# Altium PCB Analog.PcbDoc
Units mm, origin at the board's own origin, x right, y up, seen from the top; angles counter-clockwise.
Board outline 78.49 x 77.09 mm, 2 copper layers (Top Layer, Bottom Layer); 44 components, 21 nets, 117 pads, 23 vias.
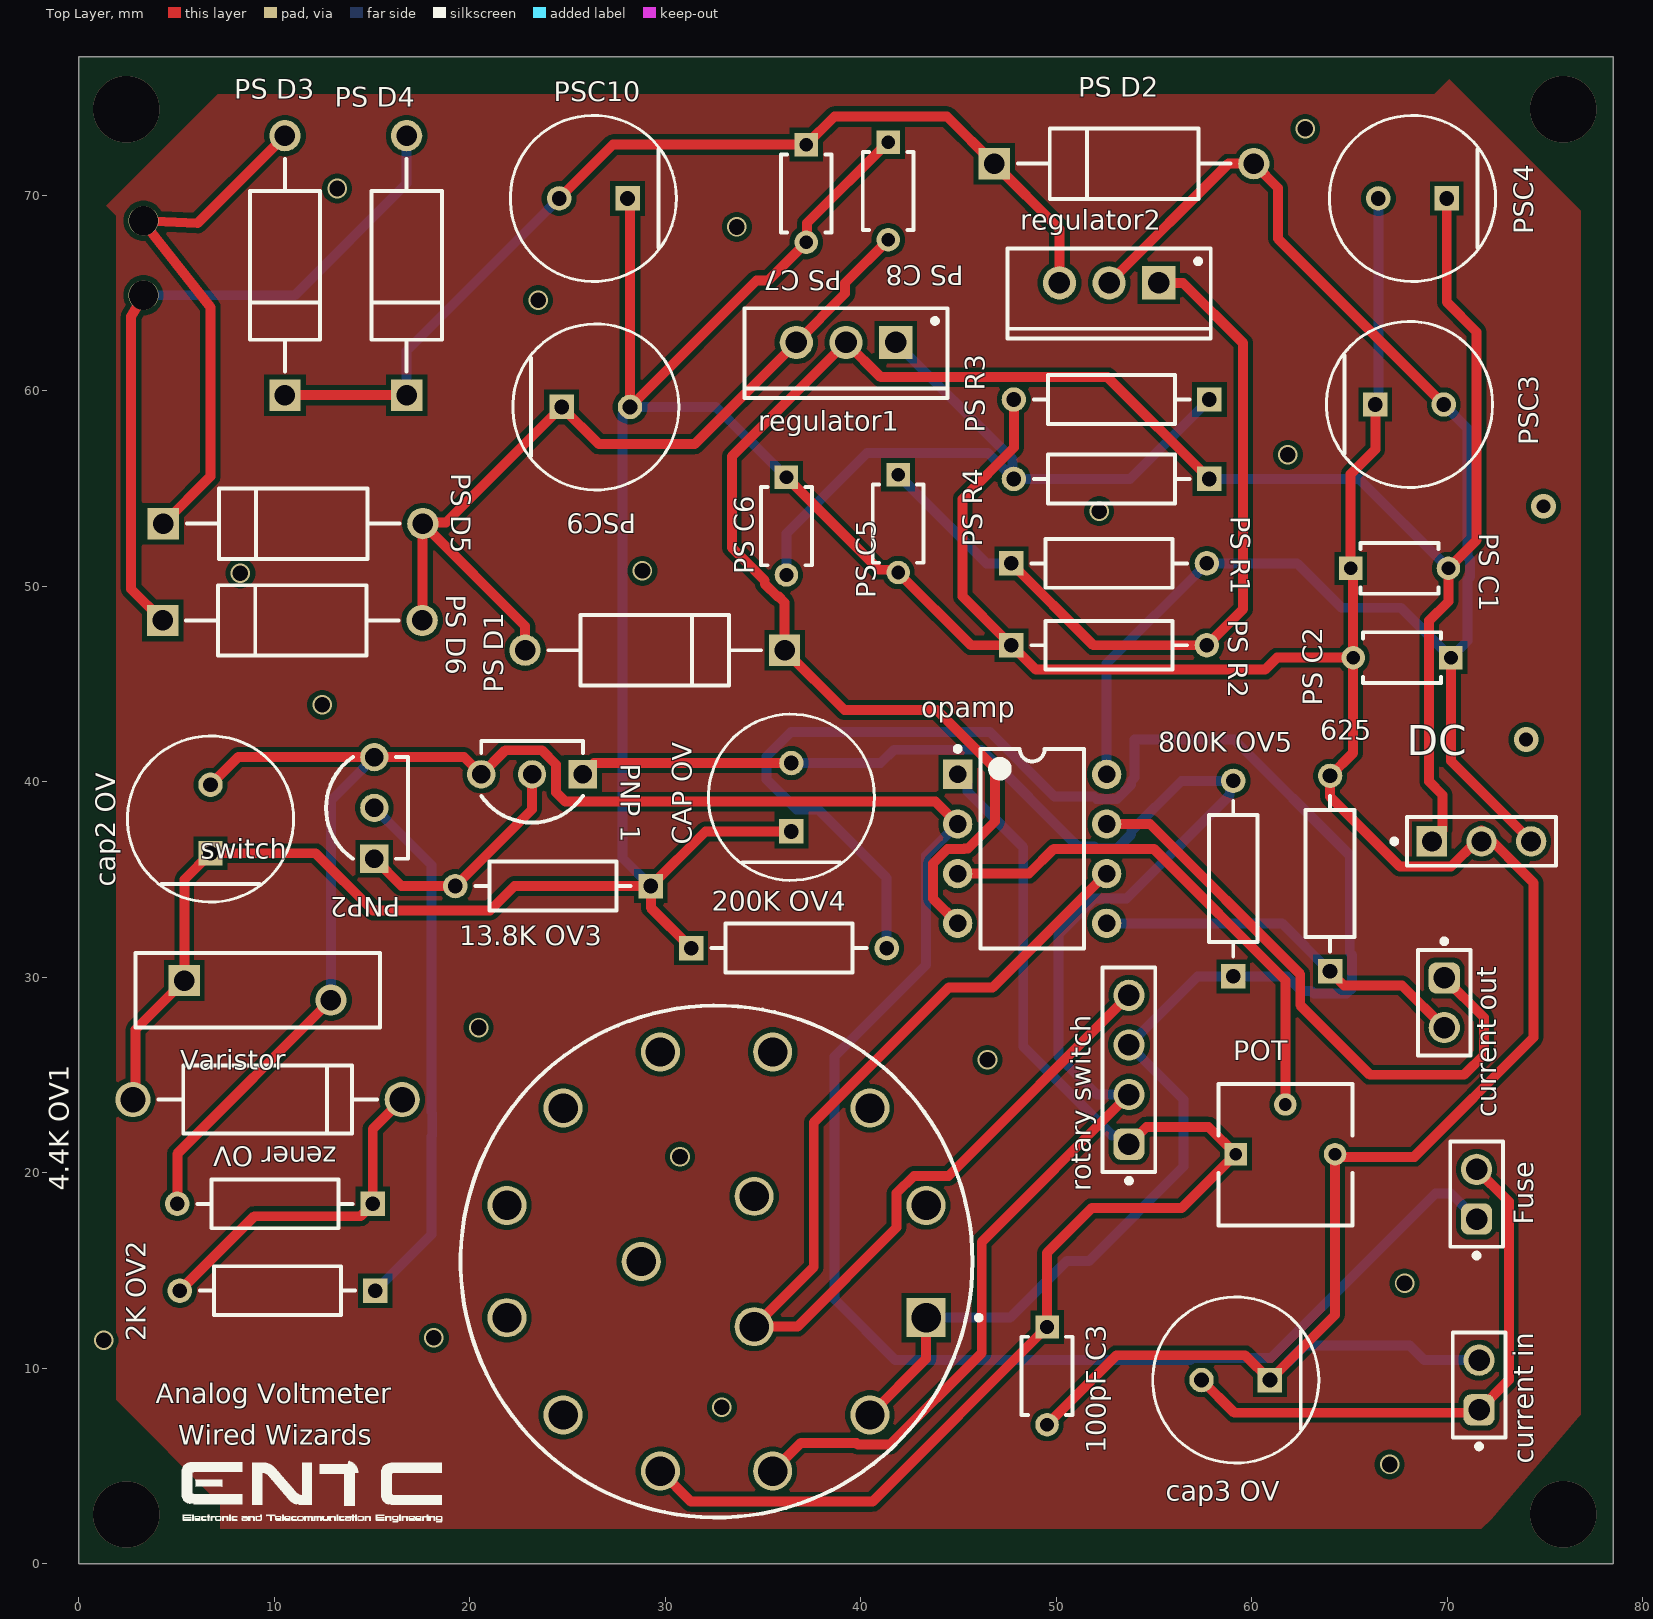
[diagram p0: Top Layer view]
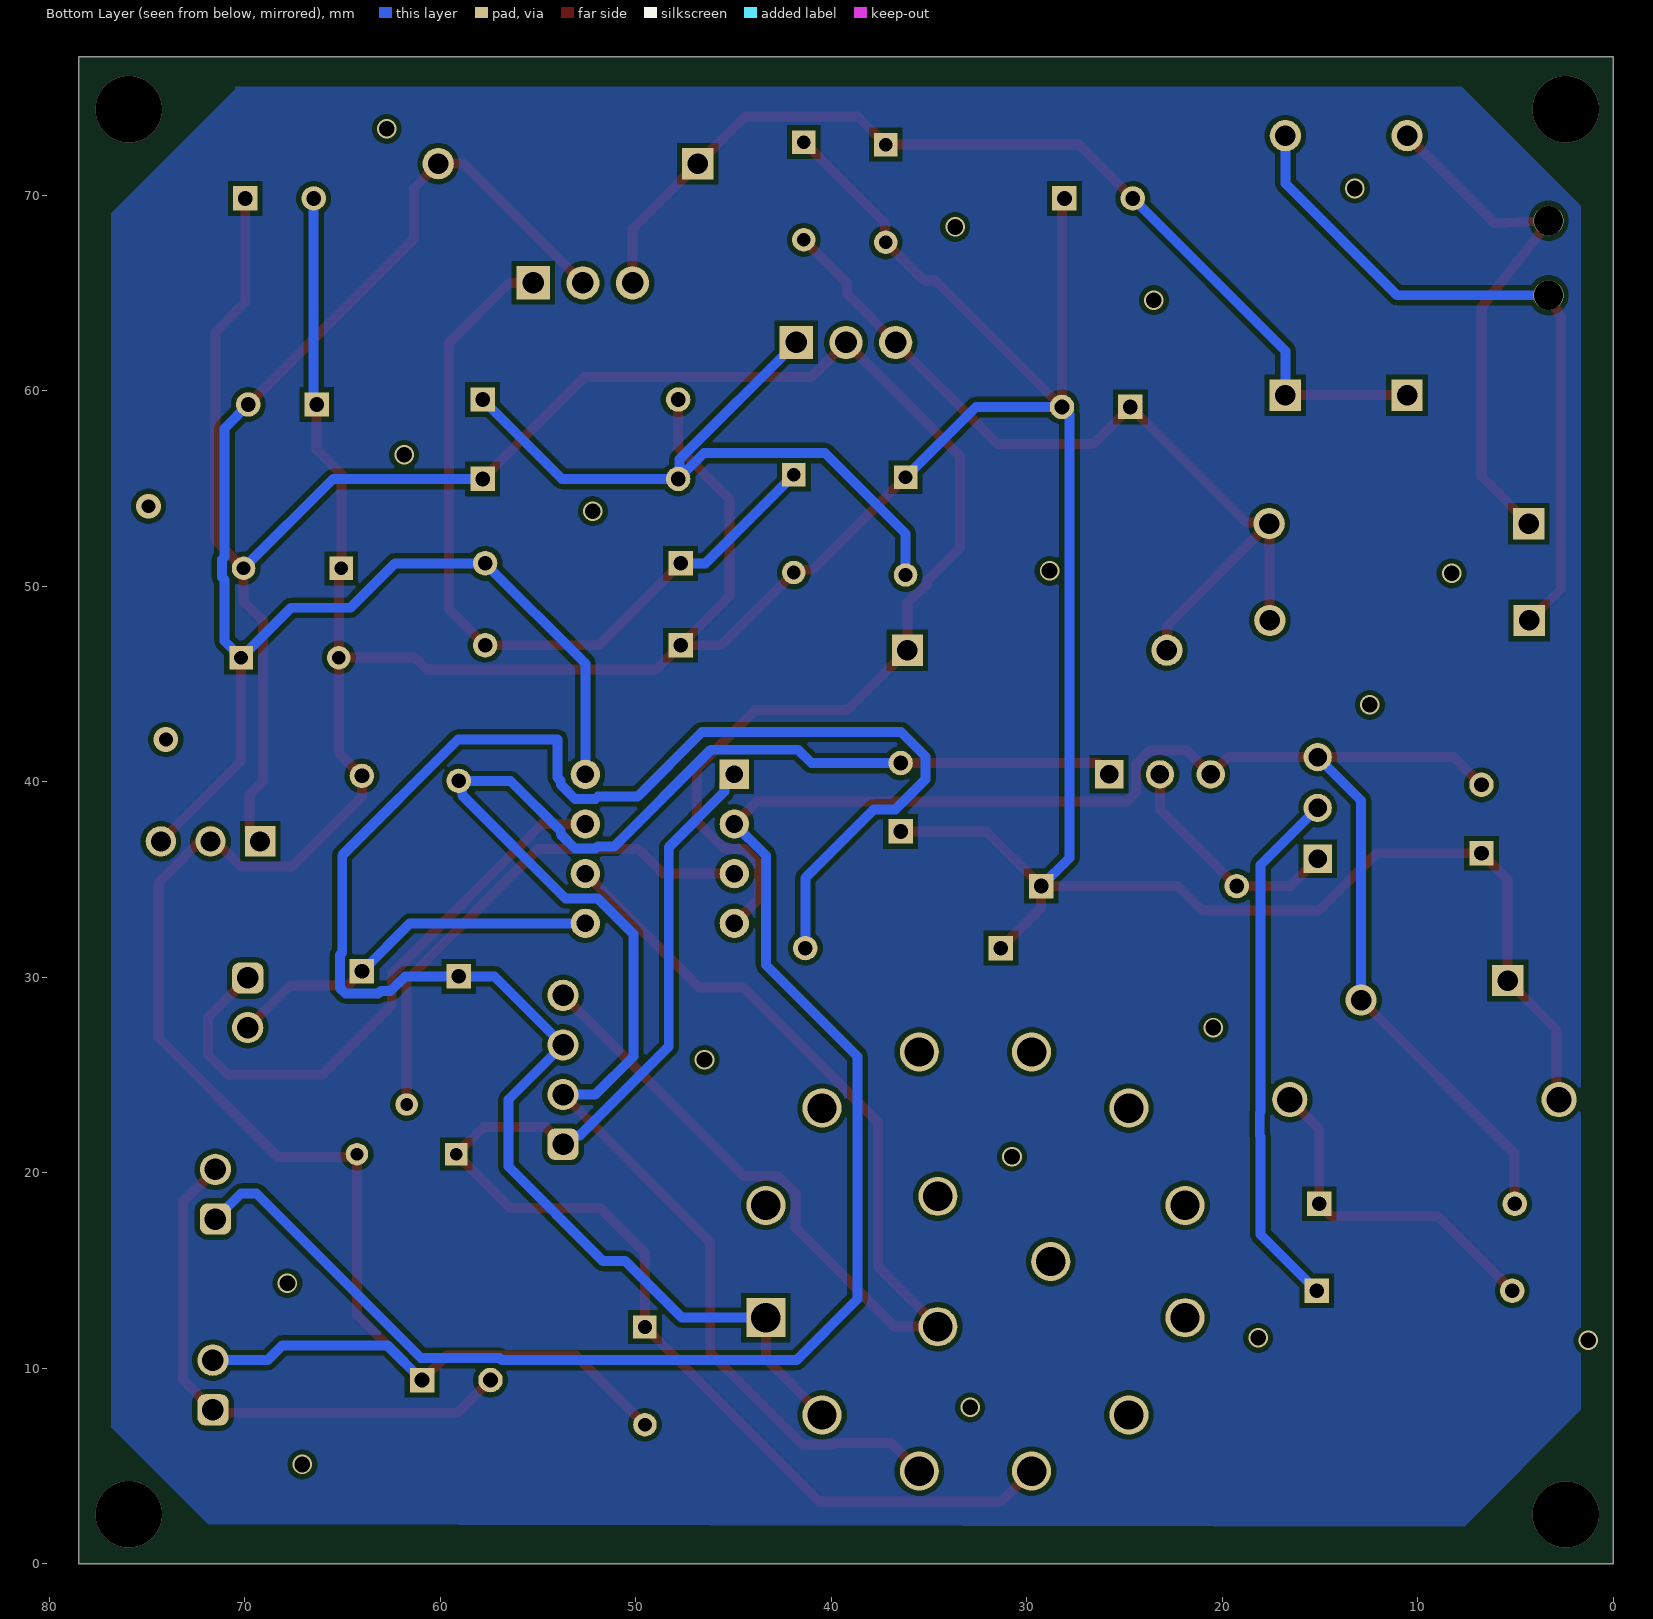
[diagram p1: Bottom Layer view, seen from below]
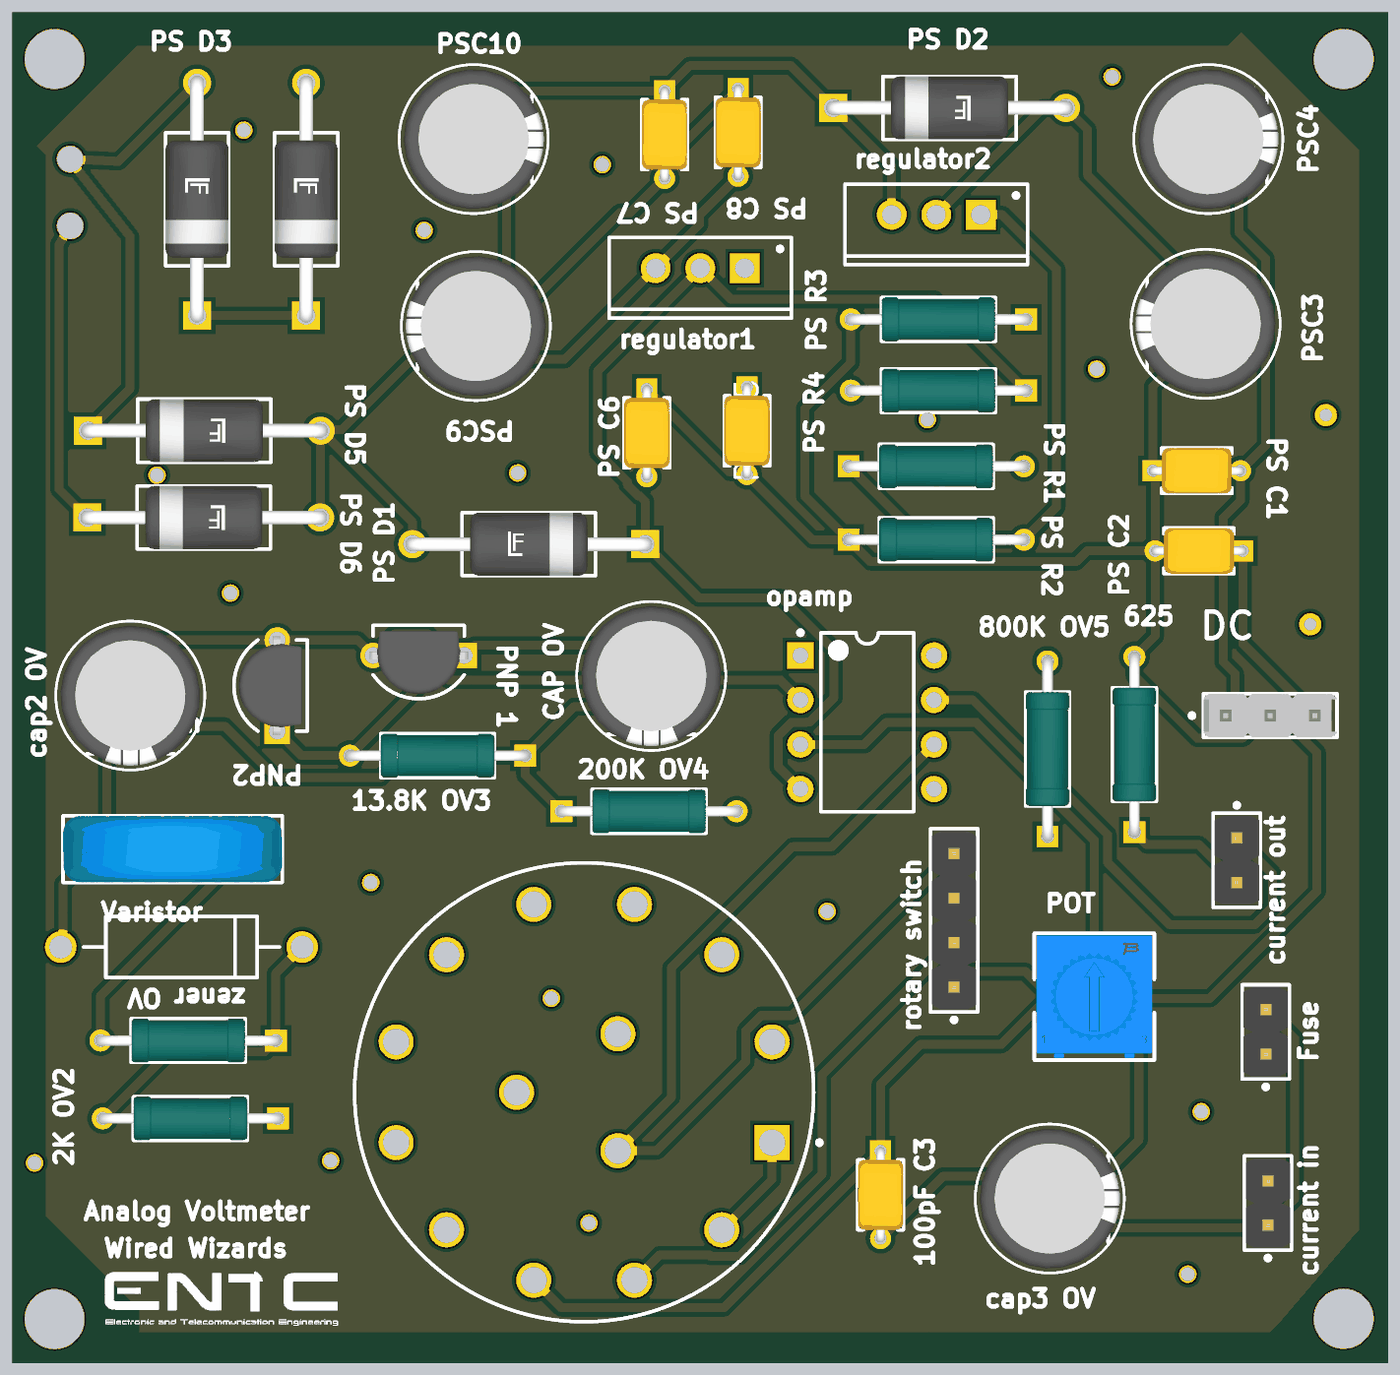
[diagram p2: 3D render of the assembled board from above, using the file's embedded part models]

## Layer stack, top to bottom
Top Solder: solder mask 0.0102, Solder Resist, Dk 3.5
Top Layer: signal copper 0.0356
Dielectric 1: dielectric 0.32, FR-4, Dk 4.8
Bottom Layer: signal copper 0.0356
Bottom Solder: solder mask 0.0102, Solder Resist, Dk 3.5

## Board outline
0,0 78.486,0 78.486,77.089 0,77.089

## Design rules (kind name [scope] priority, off if disabled: settings)
Clearance [All] p1: gap=0.254 ignorepadtopadclearanceinfootprint=FALSE
Height [All] p1 off: minheight=0 maxheight=50 prefheight=12.7
PolygonConnect [All] p1: connectstyle=Relief reliefconductorwidth=0.254 reliefentries=4 polygonreliefangle="90 Angle" airgapwidth=0.254
RoutingVias [All] p1: holewidth=0.711 width=1.27 viastyle="Through Hole" minholewidth=0.711 minwidth=1.27 maxholewidth=0.711 maxwidth=1.27
SolderMaskExpansion [All] p1: expansion=0.102 istentingtop=FALSE
SupplyNets "Schematic Supply Nets" [InNet('GND')] p1: voltage=0.000
Width [All] p1: maxlimit=0.508 minlimit=0.254 preferedwidth=0.254 minimp=50.000000 maximp=50.000000 favimp=50.000000
29 further rules are at their usual default settings.

## Components (designator, comment, footprint, x,y, rotation, side; value= is the part's Value field where it differs from the comment)
"2K OV2" "MRS25000C1002FCT00" FP-MRS25-MFG 10.16,13.97 r180 top
"4.4K OV1" "MRS25000C1002FCT00" FP-MRS25-MFG 10.033,18.415 r180 top
"13.8K OV3" "MRS25000C1002FCT00" FP-MRS25-MFG 24.257,34.671 r180 top
"100pF C3" "K104K15X7RF5TH5" FP-K15H5-MFG 49.53,9.612 r270 top
"200K OV4" "MRS25000C1002FCT00" FP-MRS25-MFG 36.322,31.496 r0 top
625 "MRS25000C1002FCT00" FP-MRS25-MFG 64.008,35.306 r90 top
"800K OV5" "MRS25000C1002FCT00" FP-MRS25-MFG 59.055,35.052 r90 top
"cap2 OV" "ESL107M050AGMAA" FP-ESLGM-MFG 6.731,38.1 r90 top value=100uF
"cap3 OV" "ESL107M050AGMAA" FP-ESLGM-MFG 59.182,9.398 r180 top value=100uF
"CAP OV" "ESL107M050AGMAA" FP-ESLGM-MFG 36.449,39.215 r90 top value=100uF
"current in" "61300211121" 61300211121 71.628,9.144 r90 top
"current out" "61300211121" 61300211121 69.85,28.702 r270 top
DC "22-28-4033" MOLX-22-28-4033_V 71.755,36.957 r0 top
Fuse "61300211121" 61300211121 71.501,18.907 r90 top
opamp "TL072CP" P0008A 48.768,36.576 r0 top
PNP2 "BC558BTA" FP-135AR-MFG 14.733,38.668 r180 top
"PNP 1" "BC558BTA" FP-135AR-MFG 23.181,40.006 r270 top
POT "3362P-1-503TLF" FP-3362P-1-503TLF-MFG 61.722,20.92 r0 top
"PS C1" "K104K15X7RF5TH5" FP-K15H5-MFG 67.564,50.927 r0 top
"PS C2" "K104K15X7RF5TH5" FP-K15H5-MFG 67.691,46.355 r180 top
"PS C5" "K104K15X7RF5TH5" FP-K15H5-MFG 41.91,53.213 r270 top
"PS C6" "K104K15X7RF5TH5" FP-K15H5-MFG 36.195,53.086 r270 top
"PS C7" "K104K15X7RF5TH5" FP-K15H5-MFG 37.211,70.104 r270 top
"PS C8" "K104K15X7RF5TH5" FP-K15H5-MFG 41.402,70.231 r270 top
"PS D1" "P6KE6.8A" FP-P6KE-MFG 29.464,46.736 r180 top
"PS D2" "P6KE6.8A" FP-P6KE-MFG 53.467,71.628 r0 top
"PS D3" "P6KE6.8A" FP-P6KE-MFG 10.541,66.421 r90 top
"PS D4" "P6KE6.8A" FP-P6KE-MFG 16.764,66.421 r90 top
"PS D5" "P6KE6.8A" FP-P6KE-MFG 10.956,53.213 r0 top
"PS D6" "P6KE6.8A" FP-P6KE-MFG 10.922,48.26 r0 top
"PS R1" "MRS25000C1002FCT00" FP-MRS25-MFG 52.705,51.181 r0 top
"PS R2" "MRS25000C1002FCT00" FP-MRS25-MFG 52.705,46.99 r0 top
"PS R3" "MRS25000C1002FCT00" FP-MRS25-MFG 52.832,59.563 r180 top
"PS R4" "MRS25000C1002FCT00" FP-MRS25-MFG 52.832,55.499 r180 top
PSC3 "ESL107M050AGMAA" FP-ESLGM-MFG 68.227,69.85 r180 top value=100uF
PSC4 "ESL107M050AGMAA" FP-ESLGM-MFG 68.072,59.309 r0 top value=100uF
PSC9 "ESL107M050AGMAA" FP-ESLGM-MFG 26.317,69.85 r180 top value=100uF
PSC10 "ESL107M050AGMAA" FP-ESLGM-MFG 26.444,59.182 r0 top value=100uF
regulator1 "LM317T" TO-220 39.243,62.484 r180 top
regulator2 "LM317T" TO-220 52.705,65.532 r180 top
"rotary switch" "61300411121" 61300411121 53.721,25.273 r90 top
switch "A30415RNCQ" CKCP-A30415RNCQ-15_V 32.619,15.462 r0 top
Varistor "MOV-10D201KTR" FP-MOV-10D201KTR-MFG 9.144,29.337 r0 top value=600pF
"zener OV" "1N5347BRLG" ONSC-SURMETIC40-2-017AA-01 9.652,23.749 r180 top

## Footprints (in the part's own frame and the unit in brackets; to place one, negate y for a bottom-side part, rotate by r counter-clockwise, add the part's x,y. Pads: shape width x height; smd on the part's side, far side on the other; paste and mask are expansions set on the pad)
61300211121 [mm] "Pin Header, pitch 2.54 mm, THT, Vertical, single row, 2p"
  rrect50% 1.6x1.6 hole 1.1: 1(-1.27,0)
  round 1.6 hole 1.1: 2(1.27,0)
  silkscreen extent -3.26,-1.35 2.69,1.35, body extent -2.54,-1.27 2.54,1.27, height 8.57
61300411121 [mm] "Pin Header, pitch 2.54 mm, THT, Vertical, single row, 4p"
  rrect50% 1.6x1.6 hole 1.1: 1(-3.81,0)
  round 1.6 hole 1.1: 2(-1.27,0) 3(1.27,0) 4(3.81,0)
  silkscreen extent -5.8,-1.35 5.23,1.35, body extent -5.08,-1.27 5.08,1.27, height 8.57
CKCP-A30415RNCQ-15_V [mm] "Rotary Switch, A, 1-4, B, 5-8, C, 9-12 Terminals, Dia 26.19mm, Height 60.59mm"
  rect 2x2 hole 1.5: 1(10.722,-2.873)
  round 2 hole 1.5: 2(7.849,-7.849) 3(2.873,-10.722) 4(-2.873,-10.722) 5(-7.849,-7.849) 6(-10.722,-2.873) 7(-10.722,2.873) 8(-7.849,7.849) 9(-2.873,10.722) 10(2.873,10.722) 11(7.849,7.849) 12(10.722,2.873) A(1.925,-3.334) B(-3.85,0) C(1.925,3.334)
  silkscreen extent -13.09,-13.09 13.54,13.09, body extent -12.99,-13.07 13.09,13.07, height 60.58
FP-135AR-MFG [mm]
  rect 1.45x1.45 hole 0.95 paste-2539.97 mask+0: 1(-0.38,2.6)
  round 1.45 hole 0.95 paste-2539.97 mask+0: 2(-0.38,0) 3(-0.38,-2.6)
  silkscreen extent -2.09,-2.6 2.09,2.6, body extent -2.19,-3.42 2.19,3.42, height 0.25
FP-3362P-1-503TLF-MFG [mm]
  rect 1.15x1.15 hole 0.65 paste-2539.97 mask+0: 1(-2.54,0.035)
  round 1.15 hole 0.65 paste-2539.97 mask+0: 2(0,2.575) 3(2.54,0.035)
  silkscreen extent -3.42,-3.62 3.42,3.62, body extent -3.52,-3.72 3.52,3.72, height 0.25
FP-ESLGM-MFG [mm]
  rect 1.25x1.25 hole 0.75 paste-2539.97 mask+0: 1(-1.75,0)
  round 1.25 hole 0.75 paste-2539.97 mask+0: 2(1.75,0)
  silkscreen extent -4.25,-4.25 4.25,4.25, body extent -4.35,-4.35 4.35,4.35, height 0.25
FP-K15H5-MFG [mm]
  rect 1.2x1.2 hole 0.7 paste-2539.97 mask+0: 1(-2.5,0)
  round 1.2 hole 0.7 paste-2539.97 mask+0: 2(2.5,0)
  silkscreen extent -2,-1.3 2,1.3, body extent -3.2,-1.4 3.2,1.4, height 0.25
FP-MOV-10D201KTR-MFG [mm]
  rect 1.6x1.6 hole 1.05 paste-2539.97 mask+0: 1(-3.75,0.5)
  round 1.6 hole 1.05 paste-2539.97 mask+0: 2(3.75,-0.5)
  silkscreen extent -6.25,-1.9 6.25,1.9, body extent -6.35,-2 6.35,2, height 0.25
FP-MRS25-MFG [mm]
  rect 1.25x1.25 hole 0.75 paste-2539.97 mask+0: 1(-5,0)
  round 1.25 hole 0.75 paste-2539.97 mask+0: 2(5,0)
  silkscreen extent -3.98,-1.25 3.98,1.25, body extent -5.72,-1.35 5.72,1.35, height 0.25
FP-P6KE-MFG [mm]
  rect 1.6x1.6 hole 1.05 paste-2539.97 mask+0: 1(-6.638,0)
  round 1.6 hole 1.05 paste-2539.97 mask+0: 2(6.638,0)
  silkscreen extent -5.44,-1.8 5.44,1.8, body extent -7.54,-1.9 7.54,1.9, height 0.25
MOLX-22-28-4033_V [mm] "THD, 3-Leads, Body 7.62x2.49mm, Pitch 2.54mm"
  rect 1.55x1.55 hole 1.02: 1(-2.54,0)
  round 1.55 hole 1.02: 2(0,0) 3(2.54,0)
  silkscreen extent -4.58,-1.24 3.81,1.24, body extent -3.81,-1.24 3.81,1.24, height 8.38
ONSC-SURMETIC40-2-017AA-01 [mm] "AXIAL, 2-Leads, Diameter 3.49mm"
  round 1.8 hole 1.3: 1(-6.887,0) 2(6.887,0)
  silkscreen extent -5.59,-1.75 5.59,1.75
P0008A [mm] "DIP, 8-Leads, Body 10.15x6.6mm, Pitch 2.54mm"
  rect 1.5x1.5 hole 0.9: 1(-3.81,3.81)
  round 1.5 hole 0.9: 2(-3.81,1.27) 3(-3.81,-1.27) 4(-3.81,-3.81) 5(3.81,-3.81) 6(3.81,-1.27) 7(3.81,1.27) 8(3.81,3.81)
  silkscreen extent -3.93,-5.1 2.65,5.23, body extent -3.95,-5.07 3.95,5.07, height 5.08
TO-220 [mm] "TO, Thru-Hole, Vertical, Heatsink Mounted; 3 In-Line Leads; Pitch 2.54 mm"
  rect 1.7x1.7 hole 1.1: 1(-2.54,0)
  round 1.7 hole 1.1: 2(0,0) 3(2.54,0)
  silkscreen extent -5.2,-1.75 5.2,2.85, body extent -5.25,-1.8 5.25,2.9, height 19.7

## Part data
"2K OV2" "4.4K OV1" "13.8K OV3" "200K OV4" 625 "800K OV5" "PS R1" "PS R2" "PS R3" "PS R4": library part CMP-00030-42632392-1, "MRS25000C1002FCT00 Resistor, 10 kOhm, ± 1%, 600 mW, Axial Leaded, Metal Film (Thin Film), Professional", Case/Package=Conformal, Max Operating Temperature=155°C, Max Power Dissipation=600mW, Min Operating Temperature=-55°C, Resistance=10kΩ, Temperature Coefficient=50ppm/°C, Tolerance=1%, Voltage Rating=350V, Composition="Metal Film, Thin Film", Contact Plating=Tin, Diameter=2.5mm, Lead Free="Lead Free", Lead Length=26mm, Length=6.5mm, Military Standard=Not, Mount="Through Hole", NexarPartId=42632392, Number of Pins=2, Number of Terminations=2, Power Rating=600mW, Radiation Hardening=No, REACH SVHC=Unknown, RoHS=Compliant, Schedule B="8533210090, 8533210090", Termination=Axial, Voltage Rating (DC)=350V, Width=2.5mm
"100pF C3" "PS C1" "PS C2" "PS C5" "PS C6" "PS C7" "PS C8": library part CMP-02417-000078-1, "CAP CER 0.1UF 50V X7R RADIAL", Capacitance=100nF, Case/Package=Dipped, Dielectric=X7R, Dielectric Material=Ceramic, Max Operating Temperature=125°C, Min Operating Temperature=-55°C, Package Quantity=1, Tolerance=10%, Voltage=50V, Construction=RADIAL, Depth=2.5mm, Diameter=500um, Height=4mm, Height - Seated (Max)=0.257inch, Lead Diameter=0.5mm, Lead Free="Lead Free", Lead Length=30mm, Lead Pitch=5mm, Lead/Base Style="Formed Leads", Length=4mm, Mount="Through Hole", Packaging="Tape and Reel", Radiation Hardening=No, RoHS Compliant=Yes, Series=K, Termination=Radial, Thickness=2.6mm, Voltage Rating=50V, Voltage Rating (DC)=50V, Weight=0.005644oz, Width=2.5mm
"cap2 OV" "cap3 OV" "CAP OV" PSC3 PSC4 PSC9 PSC10: library part CMP-03015-000005-1, "CAP ALUM 100UF 20% 50V THRU HOLE", Capacitance=100uF, Leakage Current=50uA, Manufacturer=KEMET, Package=ESLGM, Ripple Current=725mA, Temperature="-40°C to +105°C", Temperature Range High=+105°C, Temperature Range Low=-40°C, Tolerance=20%, Voltage Rating=50V, Automotive=No, Category=Cap, ComponentLink2Description=Datasheet, ComponentLink2URL=https://content.kemet.com/datasheets/KEM_A4074_ESL.pdf, Device Class L1="Passive Components", Device Class L2=Capacitors, Device Class L3="Aluminum Electrolytic Capacitors", Digikey Description="CAP ALUM 100UF 20% 50V THRU HOLE", Dissipation Factor=10%, Esr=0.12Ω, Height=13.5mm, Lead Free=Yes, Life=10000Hours, Manufacturer Part Number=ESL107M050AGMAA, Material=Aluminum, Octopart=https://octopart.com/esl107m050agmaa-kemet-84758890, RoHS=TRUE
"current in" "current out" Fuse: library part CMP-1712-00002-6, Color=Black, Contact Resistance=20mΩ, Current Rating=3A, Max Operating Temperature=125°C, Min Operating Temperature=-40°C, Operating Supply Voltage=250V, Connector Type="Male Pin", Contact Gender=Male, Contact Material=Copper, Contact Mating Length=5.9944mm, Contact Plating=Gold, Gender=Male, Height=8.94mm, Housing Material=PBT, Lead Free="Lead Free", Lead Pitch=2.54mm, Mount="Through Hole", NexarPartId=20081794, Number of Contacts=2, Number of Pins=2, Number of Positions=2, Number of Rows=1, Orientation=Vertical, Packaging=Bulk, Pitch=2.54mm, REACH SVHC="No SVHC", RoHS=Compliant, Termination="Through Hole", Voltage Rating=250V
DC: library part CMP-1676-00001-5, "Male Header, Pitch 2.54 mm, 1 x 3 Position, Height 8.38 mm, Tail Length 3.18 mm, RoHS, Bulk", Colour=Black, Current Rating="4 A", Manufacturer=Molex, Max Operating Temperature="75 degC", Min Operating Temperature="0 degC", Package Quantity=1, Voltage Rating="250 V", ComponentLink1Description="Manufacturer URL", ComponentLink1URL=http://www.molex.com/, ComponentLink2Description=Datasheet, ComponentLink2URL=http://www.molex.com/pdm_docs/sd/022284033_sd.pdf, Contact Finish=Gold, Contact Material=Brass, Contact Plating=Gold, DatasheetVersion="Rev. G, 01/2012", Height="8.38 mm", Lead Pitch="0.1 inch", Length="7.62 mm", Mount="Through Hole", Mounting Technology="Through Hole", PackageDescription="Male Header, Pitch 2.54 mm, 1 x 3 Position, Height 8.38 mm, Tail Length 3.18 mm", PackageReference=22-28-4033, Packaging=Bulk, Pins=3, REACH SVHC=Unknown, RoHSCompliant=true, Rows=1
opamp: library part CMP-0017-00950-2, "Dual Low-Noise JFET-Input General-Purpose Operational Amplifier, 7 to 36 V, 0 to 70 degC, 8-pin DIP (P8), Pb-Free (RoHS)", Manufacturer="Texas Instruments", Rating=Catalog, Total Supply Voltage(Max)(+5V is 5, +/-5V is 10)=36, Total Supply Voltage(Min)(+5V is 5, +/-5V is 10)=7, CMRR(Min)(dB)=70, Code_JEDEC=MS-001, ComponentLink1Description="Manufacturer URL", ComponentLink1URL=http://www.ti.com/, ComponentLink2Description=Datasheet, ComponentLink2URL=http://www.ti.com/lit/ds/symlink/tl072.pdf, ComponentLink3Description="Package Specification", ComponentLink3URL=http://www.ti.com/litv/pdf/mpdi001b, DatasheetVersion=SLOS080J, Eco-Plan="Pb-Free (RoHS)", GBW(Typ)(MHz)=3, IIB(Max)(pA)=200, Iq per channel(Max)(mA)=2.5, Mounting Technology="Through Hole", Number of Channels=2, Offset Drift(Typ)(uV/C)=18, PackageDescription="8-Pin Plastic In-Line, Body 9.59 x 6.35 mm, Pitch 2.54 mm", PackageReference=P0008A, PackageVersion="4040082/E, 04/2010", PartNumber=TL072CP, Slew Rate(Typ)(V/us)=13, Sub Family="General Purpose Amplifier, High Supply Voltage Amplifier (>=30V)", Vio (25C)(Max)(mV)=10, Vn at 1kHz(Typ)(nV/rtHz)=18
PNP2 "PNP 1": library part CMP-00278-84408946-1, "BC558BTA Small Signal Bipolar Transistor, 0.1A I(C), 30V V(BR)CEO, 1-Element, PNP, Silicon, TO-92", Case/Package=TO-92, Collector Base Voltage (VCBO)=-30V, Collector Emitter Breakdown Voltage=30V, Collector Emitter Saturation Voltage=-250mV, Current Rating=-100mA, Emitter Base Voltage (VEBO)=-5V, Frequency=150MHz, Max Frequency=10MHz, Max Junction Temperature (Tj)=150°C, Max Power Dissipation=500mW, Min Operating Temperature=-65°C, Collector Emitter Voltage (VCEO)=-30V, Contact Plating=Tin, Element Configuration=Single, Gain Bandwidth Product=150MHz, Height=5.33mm, hFE Min=110, Lead Free="Lead Free", Length=5.2mm, Max Breakdown Voltage=30V, Max Collector Current=-100mA, Max Operating Temperature=150°C, Mount="Through Hole", NexarPartId=84408946, Number of Elements=1, Number of Pins=3, Polarity=PNP, Power Dissipation=500mW, REACH SVHC="No SVHC", RoHS=Compliant, Schedule B=8541210080, Transition Frequency=150MHz, Voltage Rating (DC)=-30V, Weight=240mg, Width=4.19mm
POT: library part CMP-07234-000028-1, "TRIMMER 50K OHM 0.5W PC PIN TOP", Max Operating Temperature=125°C, Max Power Dissipation=500mW, Min Operating Temperature=-55°C, Package Quantity=50, Resistance=50kR, Resistance Tolerance=10%, Resistor Type=Cermet, Temperature Coefficient=100ppm/°C, Voltage Rating (DC)=300V, Depth=7.04mm, Height=0.185inch, Lead Free="Lead Free", Length=6.6mm, Military Standard=Not, Mount="Through Hole", Number of Turns=1, Packaging=Rail/Tube, Power Rating=500mW, Radiation Hardening=No, REACH SVHC="No SVHC", RoHS Compliant=Yes, Series="Trimpot® 3362 - Sealed", Technology=CERMET, Termination=Pin, Tolerance=10%, Weight=0.02oz, Width=4.7mm
"PS D1" "PS D2" "PS D3" "PS D4" "PS D5" "PS D6": library part CMP-08607-000072-1, "TVS DIODE 5.8V 10.5V DO204AC", Breakdown Voltage=6.45V, Clamping Voltage=10.5V, Manufacturer="Littelfuse Inc", Max Junction Temp=+175°C, Package=P6KE, Peak Pulse Current=58.1A, Peak Pulse Power=600W, Reverse Standoff Voltage=5.8V, Temperature="-55°C to +175°C", Temperature Range Low=-55°C, Automotive=No, Category=Diode, ComponentLink2Description=Datasheet, ComponentLink2URL=https://www.littelfuse.com/~/media/electronics/datasheets/tvs_diodes/littelfuse_tvs_diode_p6ke_datasheet.pdf.pdf, Device Class L1="Circuit Protection", Device Class L2="TVS Diodes", Device Class L3=unset, Digikey Description="TVS DIODE 5.8V 10.5V DO204AC", Direction=Unidirectional, Height=3.6mm, Ipc Land Pattern Name=DIOPA1328W105L760D360, Lead Free=Yes, Manufacturer Part Number=P6KE6.8A, Mouser Description="TVSS; Diode; For Data/Comm; Industrial Equip; 58.1A; Thru-Hole; Solder Term", Number of Channels=1, Octopart=https://octopart.com/p6ke6.8a-littelfuse-20808, RoHS=TRUE, Temperature Range High=+175°C
regulator1 regulator2: library part CMP-0244-00444-1, "1.5A, 1.2V to 37V Adjustable Voltage Regulator, 3-Pin TO-220", ComponentLink1Description="Manufacturer URL", ComponentLink1URL=http://www.st.com, ComponentLink2Description=Datasheet, ComponentLink2URL=http://www.st.com/internet/com/TECHNICAL_RESOURCES/TECHNICAL_LITERATURE/DATASHEET/CD00000455.pdf, ComponentLink3Description="Package Specification", ComponentLink3URL=http://www.st.com/internet/com/TECHNICAL_RESOURCES/TECHNICAL_LITERATURE/PACKAGE_INFORMATION/CD00004649.pdf, DatasheetVersion=1/11/2011, PackageDescription="TO, Thru-Hole, Vertical, Heatsink Mounted; 3 In-Line Leads; Pitch 2.54 mm", PackageReference=TO-220, PackageVersion=2011
"rotary switch": library part CMP-1502-01064-3, Color=Black, Contact Resistance=20mΩ, Current Rating=3A, Max Operating Temperature=105°C, Min Operating Temperature=-40°C, Operating Supply Voltage=250V, Connector Type="Male Pin", Contact Material=Copper, Contact Mating Length=5.9944mm, Contact Plating=Gold, Gender=Male, Height=8.89mm, Lead Free="Lead Free", Lead Pitch=2.54mm, Mount="Through Hole", NexarPartId=32855522, Number of Contacts=4, Number of Pins=4, Number of Positions=4, Number of Rows=1, Orientation=Vertical, Packaging=Bulk, Pitch=2.54mm, REACH SVHC=Unknown, RoHS=Compliant, Termination=Solder, Voltage Rating=250V
switch: library part CMP-1076-00010-1, "A Series Rotary Switch, 3 Poles, 4 Positions, 30 deg Angle of Throw, -30 to 85 degC, RoHS", Manufacturer="C&K Components", Temperature Range="-30 to 85 degC", Angle of Throw="30 deg", ComponentLink1Description="Manufacturer URL", ComponentLink1URL=http://www.ck-components.com/, ComponentLink2Description=Datasheet, ComponentLink2URL=http://www.ck-components.com/13397/arotary_9apr14.pdf/, ComponentLink3Description="Package Specification", ComponentLink3URL=http://www.ck-components.com/13397/arotary_9apr14.pdf/, DatasheetVersion=41821, Mounting Technology="Through Hole", PackageDescription="15-Pin Through Hole Device, Dia 26.19 mm, Height 60.59 mm", PackageReference=A30415RNCQ-15, PartNumber=A30415RNCQ, Pole=3, Position=4, RoHS=TRUE, Series=A
Varistor: library part CMP-07402-000009-1, "VARISTOR 200V 2.5KA DISC 10MM", Capacitance=600pF, Clamping Current=25A, Clamping Voltage=340V, Manufacturer="Bourns Inc.", Package=0, Temperature="-40°C to +105°C", Temperature Range High=+105°C, Temperature Range Low=-40°C, Varistor Voltage=185V, Voltage Rating Ac=130V, Voltage Rating Dc=170V, Voltage Tolerance=10%, Automotive=No, Category=Res, ComponentLink2Description=Datasheet, ComponentLink2URL=https://www.bourns.com/docs/Product-Datasheets/MOV10D.pdf, Device Class L1="Circuit Protection", Device Class L2=Varistors, Device Class L3=unset, Digikey Description="VARISTOR 200V 2.5KA DISC 10MM", Height=15.5mm, Lead Free=Yes, Manufacturer Part Number=MOV-10D201KTR, Mouser Description="Varistors 250pF 200volts 10%", Octopart=https://octopart.com/mov-10d201ktr-bourns-19184757, RoHS=TRUE
"zener OV": library part CMP-1060-01277-1, "5 W Zener Voltage Regulator, 2-Pin Surmetic(TM) 40, Pb-Free, Tape and Reel", Manufacturer="On Semiconductor", ComponentLink1Description="Manufacturer URL", ComponentLink1URL=http://www.onsemi.com/, ComponentLink2Description=Datasheet, ComponentLink2URL=http://www.onsemi.cn/pub_link/Collateral/1N5333B-D.PDF, ComponentLink3Description="Package Specification", ComponentLink3URL=http://www.onsemi.cn/pub_link/Collateral/017AA.PDF, DatasheetVersion="Rev. 14", Mounting Technology="Through Hole", P Max (W)=5, PackageDescription="2-Pin, Axial Lead, Diameter 3.49 mm", PackageReference=SURMETIC40-2-017AA-01, PackageVersion="Rev. O, 09/2005", Packing="Tape and Reel", PartNumber=1N5347BRLG, RoHS=Pb-Free, VZ Typ (V)=10

## Free pads (board coordinates)
  round 1.524 hole 1.5: 19(3.302,68.707) 20(3.302,64.897)

## Via types
v1: diameter 1/1 (per signal layer), hole 0.8, Top Layer to Bottom Layer, 17 vias
v2: diameter 3.4, hole 3.4, Top Layer to Bottom Layer, 4 vias
v3: diameter 1.27, hole 0.711, Top Layer to Bottom Layer, 2 vias

## Nets (pads, with @x,y where several pads share a name; then routed paths per layer and width w, separated by ;. In a path a pad name is that pad's centre, name@x,y a point inside that pad or via, vN(x,y) a via of type N, cw(c..) or ccw(c..) an arc to the next point about the centre after c; other vN are vias at no path point)
"ACi 1": "PS D3.2" "PS D5.1" pad.19 | length 26.2
  Top Layer w0.508: pad.19 6.062,68.58 10.541,73.059 ; pad.19@3.624,68.228 6.722,64.284 6.722,55.617 4.318,53.213
"ACi 2": "PS D4.2" "PS D6.1" pad.20 | length 36.2
  Top Layer w0.508: pad.20@3.379,65.028 pad.20 2.667,63.821 2.667,49.877 4.284,48.26 ; 16.51,72.898 16.671,73.059 16.764,73.059
  Bottom Layer w0.508: pad.20 11.049,64.897 16.764,70.612 16.764,73.059
common: "rotary switch.4" opamp.6 switch.A | length 59.2
  Top Layer w0.508: opamp.6 46.747,29.475 44.5,29.475 37.592,22.567 37.592,15.176 switch.A 36.766,12.128 41.833,17.195 41.833,18.959 42.716,19.843 44.481,19.843 53.721,29.083
"CURRENT IN": "cap3 OV.2" "current in.1" Fuse.2 | length 28.6
  Top Layer w0.508: 57.432,9.398 59.105,7.725 71.628,7.725 ; Fuse.2@71.414,20.264 73.152,18.526 73.152,9.398 71.628,7.874
GND: 625.2 "13.8K OV3.1" "100pF C3.2" "200K OV4.1" "cap2 OV.1" "cap3 OV.1" "CAP OV.1" "current in.2" "PS C1.1" "PS C2.2" "PS C5.2" "PS C6.1" "PS C7.2" "PS C8.1" "PS R2.1" "PS R3.2" "zener OV.2" DC.2 POT.3 PSC3.2 PSC4.1 PSC9.1 PSC10.2 Varistor.1 | length 267.7
  Top Layer w0.508: 2.892,23.749 2.892,27.334 Varistor.1 5.394,35.013 6.731,36.35 12.109,36.35 15.038,33.421 21.029,33.421 22.279,34.671 29.257,34.671 ; PSC9.1 28.194,69.723 PSC10.2 34.671,65.659 35.266,65.659 37.211,67.604 37.256,67.649 37.256,68.585 41.402,72.731 ; 31.322,31.496 29.257,33.561 29.257,34.671 ; 36.195,55.586 40.929,50.852 41.771,50.852 41.91,50.713 45.633,46.99 47.705,46.99 ; 36.449,37.465 32.051,37.465 29.257,34.671 ; 47.832,59.563 47.832,57.101 45.212,54.481 45.212,49.483 47.334,47.361 47.705,46.99 ; 49.53,7.112 53.086,10.668 59.662,10.668 60.932,9.398 64.262,12.728 POT.3 64.397,20.82 68.318,20.82 74.422,26.924 74.422,34.84 DC.2@71.755,37.507 ; PSC4.1 66.322,57.004 65.064,55.746 65.064,50.927 65.191,50.8 65.191,46.355 ; DC.2 71.483,36.957 70.2,35.674 67.577,35.674 64.008,39.243 625.2 65.191,41.489 65.191,46.355 ; 47.705,46.99 48.955,45.74 60.682,45.74 61.297,46.355 65.191,46.355
  Bottom Layer w0.508: 29.257,34.671 27.813,36.115 27.813,58.801 PSC10.2 32.599,59.182 36.195,55.586 ; 60.932,9.398 62.71,11.176 68.072,11.176 68.834,10.414 71.628,10.414 ; PSC4.1 66.477,59.464 PSC3.2
"Net2K OV2_1": "2K OV2.1" PNP2.2 | length 27.3
  Bottom Layer w0.508: 15.038,13.848 18.034,16.844 18.034,21.855 18.075,21.896 18.075,23.062 18.034,23.103 18.034,35.747 PNP2.2
"Net2K OV2_2": "2K OV2.2" "4.4K OV1.1" "zener OV.1" | length 17.7
  Top Layer w0.508: 5.16,13.97 8.97,17.78 14.398,17.78 15.033,18.415 15.033,22.243 16.539,23.749
"Net4.4K OV1_2": "4.4K OV1.2" "cap2 OV.2" "PNP 1.3" Fuse.1 opamp.2 PNP2.3 Varistor.2 | length 134.3
  Top Layer w0.508: 5.033,18.415 5.033,20.976 Varistor.2 ; 6.731,39.85 8.149,41.268 PNP2.3 19.699,41.268 20.581,40.386 21.814,41.619 23.692,41.619 24.414,40.897 24.414,39.467 24.893,38.988 43.816,38.988 opamp.2
  Bottom Layer w0.508: Varistor.2 12.894,39.049 PNP2.3 ; opamp.2 43.34,36.228 43.34,30.64 38.65,25.95 38.65,13.547 41.783,10.414 56.846,10.414 56.963,10.531 60.987,10.531 69.401,18.945 70.193,18.945 Fuse.1
"Net13.8K OV3_2": "13.8K OV3.2" "PNP 1.2" PNP2.1 | length 12.1
  Top Layer w0.508: PNP2.1 16.51,34.671 19.257,34.671 23.181,38.595 23.181,40.386
Netopamp_3: opamp.3 POT.2 | length 26.4
  Top Layer w0.508: opamp.3 48.605,35.306 49.875,36.576 54.991,36.576 61.722,29.845 POT.2
"NetPS C5_1": "PS C5.1" "PS R1.1" "PS R2.2" regulator2.1 | length 41.2
  Top Layer w0.508: 47.705,51.181 51.896,46.99 57.705,46.99 59.563,48.848 59.563,62.445 56.476,65.532 regulator2.1
  Bottom Layer w0.508: 41.91,55.713 46.442,51.181 47.705,51.181
"NetPS C6_2": "PS C6.2" "PS R3.1" "PS R4.2" regulator1.1 | length 37.1
  Bottom Layer w0.508: 36.195,50.586 36.195,52.705 40.311,56.821 46.51,56.821 47.762,55.569 ; regulator1.1 47.762,56.505 47.762,55.569 ; 57.832,59.563 53.768,55.499 47.832,55.499 47.762,55.569
"NetPS C7_1": "PS C7.1" "PS D2.1" "PS D3.1" "PS D4.1" PSC9.2 regulator2.3 | length 52
  Top Layer w0.508: 10.541,59.783 16.764,59.783 ; PSC9.2 27.321,72.604 37.211,72.604 38.648,74.041 44.416,74.041 46.829,71.628 50.165,68.292 regulator2.3
  Bottom Layer w0.508: 16.764,59.783 16.764,62.047 PSC9.2
"NetPS C8_2": "PS C8.2" "PS D1.2" "PS D5.2" "PS D6.2" PSC10.1 regulator1.3 | length 45.3
  Top Layer w0.508: 17.56,48.26 17.577,48.277 17.577,53.196 17.594,53.213 17.644,53.263 18.775,53.263 PSC10.1 26.599,57.277 31.496,57.277 regulator1.3 39.198,64.979 39.198,65.527 41.402,67.731 ; 17.638,53.169 22.826,47.981 22.826,46.736
Range1: "100pF C3.1" "rotary switch.1" opamp.1 POT.1 switch.4 | length 69.4
  Top Layer w0.508: switch.4 31.311,3.175 40.593,3.175 49.53,12.112 49.53,15.907 51.816,18.193 56.42,18.193 POT.1 57.785,22.352 54.61,22.352 53.721,21.463
  Bottom Layer w0.508: opamp.1 45.454,39.89 45.454,39.51 48.31,36.654 48.31,26.461 52.852,21.919 53.186,21.919 53.807,21.298 53.807,20.964
Range2: "800K OV5.2" "CAP OV.2" "PNP 1.1" "rotary switch.2" switch.3 | length 90.2
  Top Layer w0.508: 25.781,40.386 26.36,40.965 36.449,40.965 ; switch.3 36.927,6.176 39.773,6.176 39.843,6.105 41.502,6.105 46.187,10.789 46.187,16.469 53.721,24.003
  Bottom Layer w0.508: 36.449,40.965 41.016,40.965 41.695,41.644 46.16,41.644 51.101,36.703 51.942,36.703 52.057,36.588 53.099,36.588 53.836,37.325 53.836,37.488 56.4,40.052 59.055,40.052 58.875,39.872 58.875,39.317 53.594,34.036 51.943,34.036 50.116,32.209 50.116,25.957 52.07,24.003 53.721,24.003
Range3: "200K OV4.2" "800K OV5.1" "rotary switch.3" switch.1 switch.2 | length 100.2
  Top Layer w0.508: switch.2 43.341,10.486 switch.1 ; 58.818,29.815 59.055,30.052
  Bottom Layer w0.508: 41.322,31.496 41.322,35.092 37.816,38.598 36.713,38.598 35.179,40.132 35.179,41.297 36.427,42.545 46.609,42.545 49.899,39.255 51.93,39.255 52.057,39.128 53.099,39.128 53.836,39.865 53.836,40.045 54.007,40.216 54.007,42.164 59.093,42.164 65.014,36.243 65.014,31.268 65.141,31.141 65.141,29.471 64.843,29.173 63.173,29.173 63.046,29.3 62.548,29.3 61.796,30.052 59.055,30.052 57.23,30.052 53.721,26.543 56.515,23.749 56.515,20.32 51.689,15.494 50.537,15.494 47.632,12.589 switch.1
VCC+: "PS C2.1" "PS D2.2" "PS R1.2" DC.3 opamp.8 PSC4.2 regulator2.2 | length 77.9
  Top Layer w0.508: regulator2.2 58.801,71.628 60.105,71.628 60.146,71.587 60.186,71.547 61.341,70.392 61.341,67.79 PSC4.2 ; 70.191,46.355 70.191,41.071 DC.3@73.755,37.507
  Bottom Layer w0.508: opamp.8 52.578,46.054 57.705,51.181 62.327,51.181 64.599,48.909 67.637,48.909 70.191,46.355 71.045,47.209 71.045,50.341 71.172,50.468 71.172,51.386 71.045,51.513 71.045,58.086 PSC4.2
VCC-: "PS C1.2" "PS D1.1" "PS R4.1" DC.1 opamp.4 PSC3.1 regulator1.2 | length 112.8
  Top Layer w0.508: opamp.4 43.7,34.024 43.7,35.827 44.437,36.564 45.275,36.564 45.299,36.588 45.479,36.588 46.863,37.972 46.863,40.699 43.884,43.678 39.16,43.678 36.102,46.736 36.102,49.18 35.804,49.478 35.736,49.478 35.087,50.127 35.087,50.307 33.401,51.993 33.401,56.642 regulator1.2 41.021,60.706 52.625,60.706 57.832,55.499 ; DC.1@69.755,37.507 69.755,39.338 69.078,40.015 69.078,48.25 70.064,49.236 70.064,50.927 71.501,52.364 71.501,63.024 69.977,64.548 PSC3.1
  Bottom Layer w0.508: 57.832,55.499 65.492,55.499 70.064,50.927
volt+: "current out.1" opamp.7 | length 30.7
  Top Layer w0.508: opamp.7 54.799,37.846 62.484,30.161 62.484,28.575 66.04,25.019 70.866,25.019 71.882,26.035 71.882,27.94 69.85,29.972
volt-: 625.1 "current out.2" opamp.5 | length 19.5
  Top Layer w0.508: 625.1 64.723,29.591 67.691,29.591 69.85,27.432
  Bottom Layer w0.508: opamp.5 61.548,32.766 625.1
pads on no net: switch.5 switch.6 switch.7 switch.8 switch.9 switch.10 switch.11 switch.12 switch.B switch.C
copper on no net:
  other v1: 67.056,5.08 32.893,8.001 1.27,11.43 18.161,11.557 67.818,14.351 30.75,20.828 46.482,25.781 20.447,27.432 12.446,43.942 8.255,50.673 28.829,50.8 52.197,53.848 61.849,56.729 23.495,64.643 33.655,68.392 13.208,70.358 62.738,73.406
  other v2: 2.413,2.52 75.946,2.54 2.413,74.422 75.946,74.422
  other v3: 74.041,42.164 74.93,54.102

## Polygon pours and split planes (outlines as drawn)
no net on Top Layer "NONET_L01_P000" (solid, pour order 0): 76.708,7.493 76.835,7.62 76.835,69.215 70.104,75.946 69.342,75.184 7.112,75.184 1.397,69.469 1.905,68.961 1.905,8.382 7.239,3.048 7.239,1.778 71.755,1.778 72.263,2.286
no net on Bottom Layer "NONET_L02_P002" (solid, pour order 2): 7.62,1.905 1.651,7.874 1.651,69.469 7.747,75.565 70.485,75.565 70.485,75.438 76.835,69.088 76.835,6.985 71.882,2.032

## Silkscreen, mask and mechanical layers (free items; w line width, h text height)
Top Overlay:
  drawing of 51 lines, arcs and shapes, not listed
  text "Analog Voltmeter" at 3.937,8.207 h1
  text "Wired Wizards" at 5.08,6.096 h1